# EAGLE board SensorTemperatura (EAGLE 7.4.0)
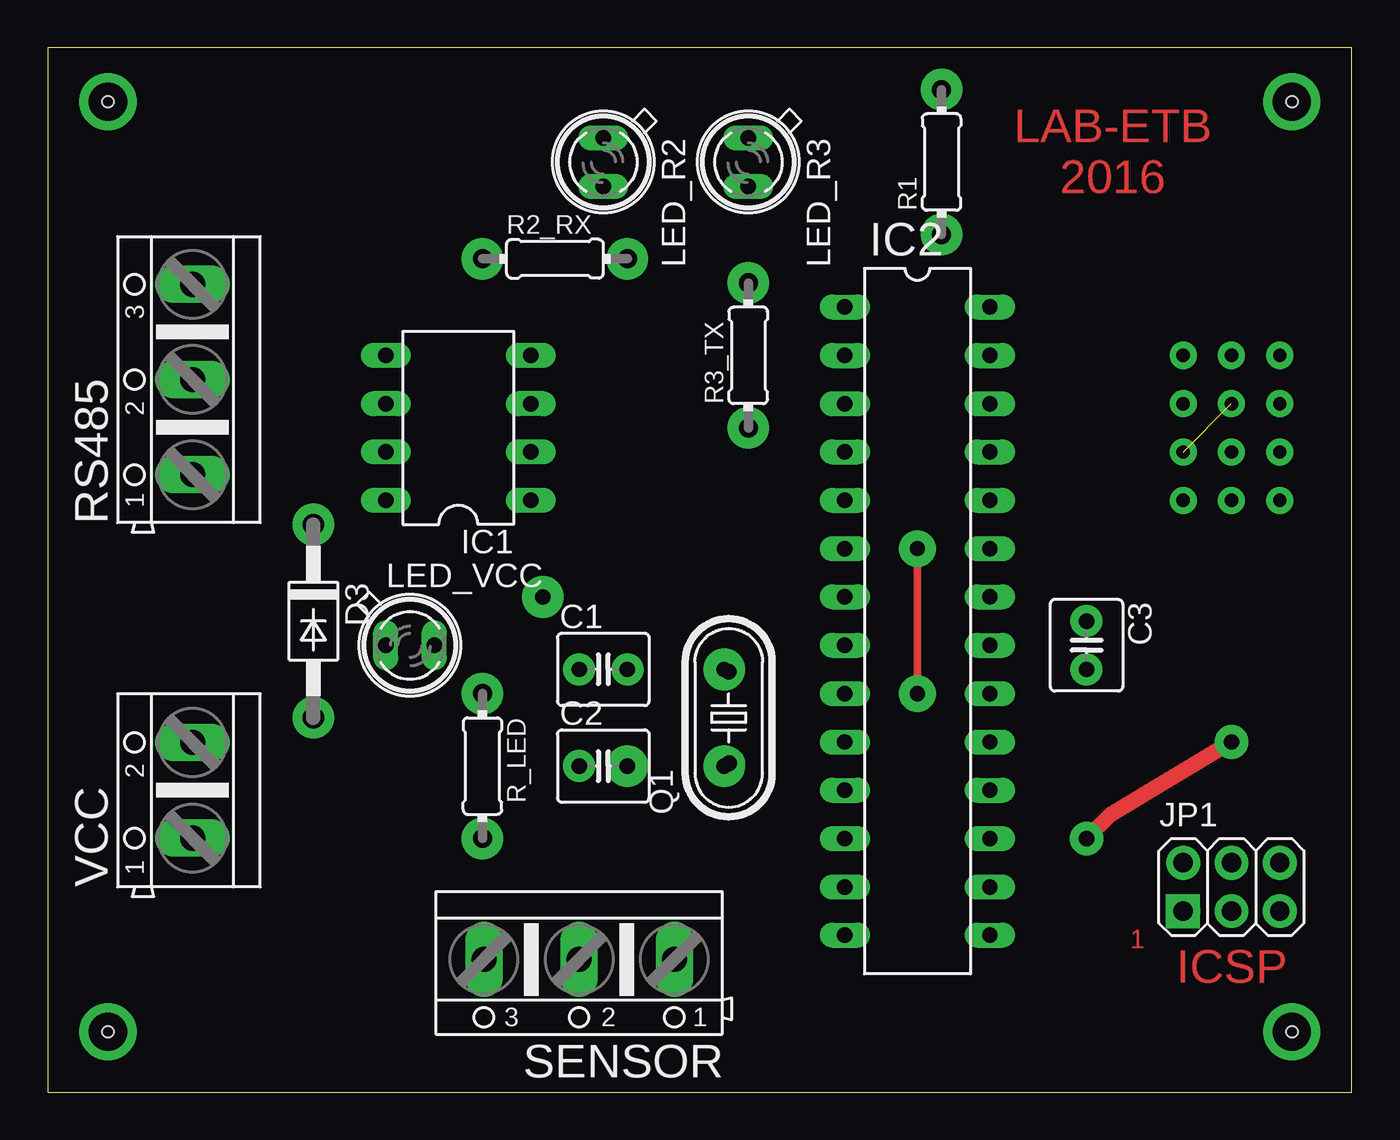
[diagram p0: board, top side]
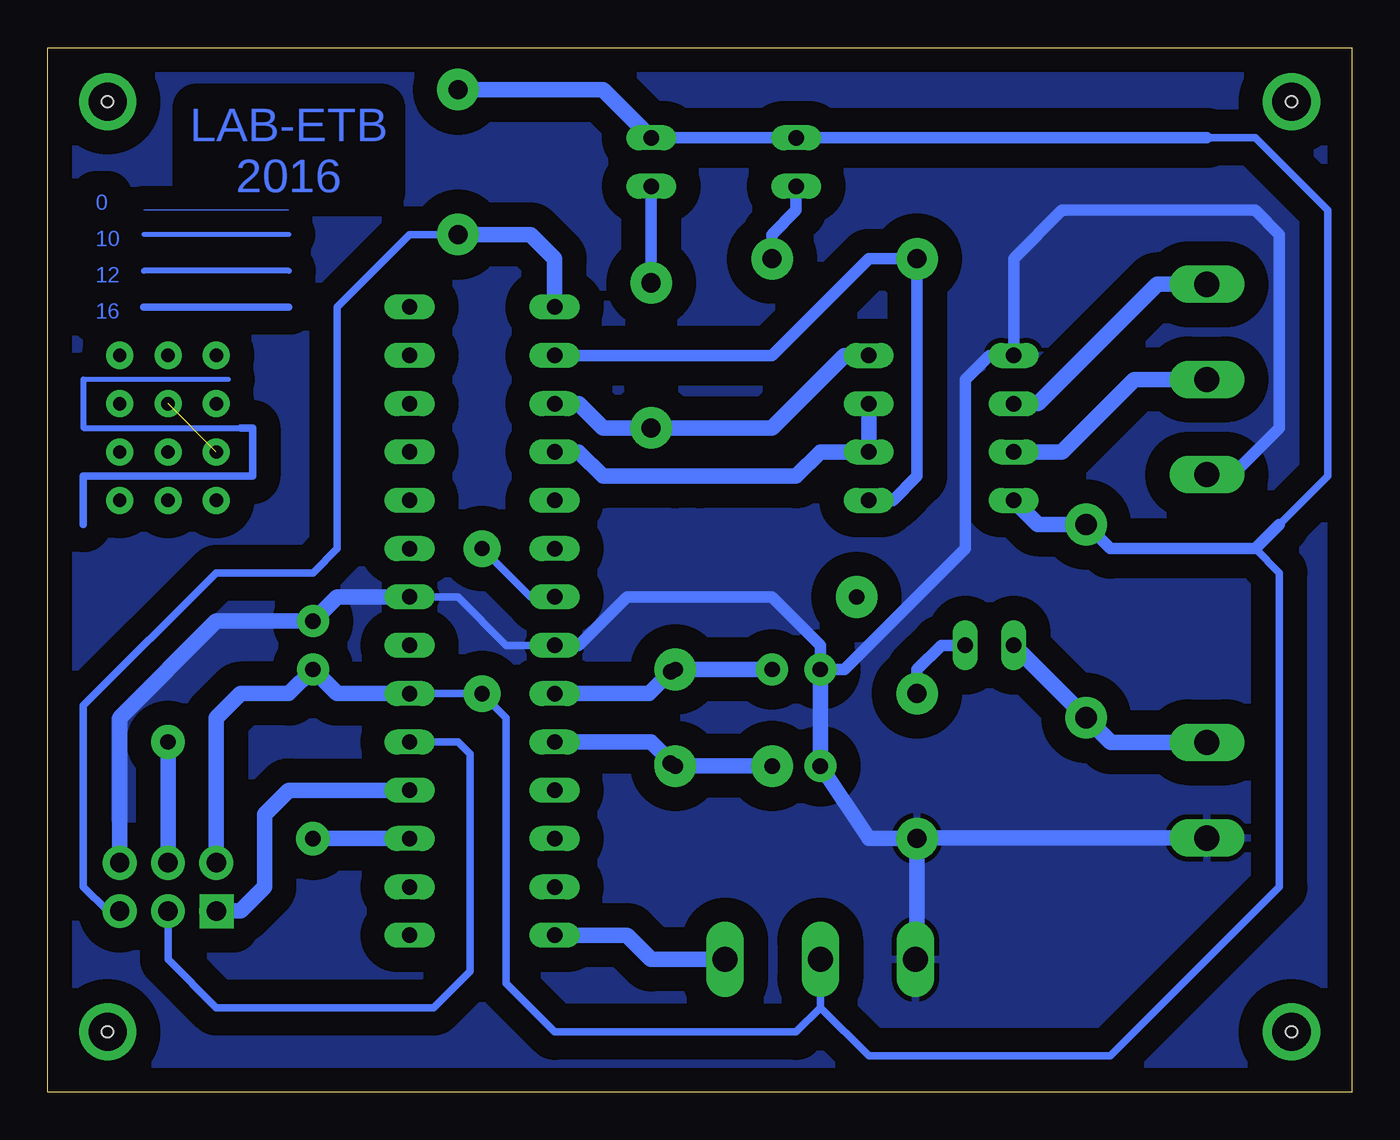
[diagram p1: board, bottom side, seen from below]

Size 68.56 x 54.92 mm. Coordinates in mm from the lower left corner, seen from the top.
Outline: 0,0 68.56,0 68.56,54.92 0,54.92 0,0
Copper layers (1*16): Top 0.035mm / dielectric 1.5mm / Bottom 0.035mm
Design rules "default": minimum track width 10mil, minimum drill 24mil, track to track 12mil, track to pad 12mil, pad to pad 12mil, via to via 12mil, smd to smd 12mil, copper to edge 40mil, drill to drill 8mil, minimum pad ring 10mil, minimum via ring 8mil, stop-mask expansion 4mil, vias tented up to drill 0mil, thermal gap 10mil
Holes 0.6 mm at 3.17,52.07 65.41,52.07 65.41,3.18 3.17,3.18

## Footprints (pad centres in the part's own frame; a part is rotated, then mirrored left to right if it is on the bottom)
C025-040X050 = drill 0.813 octagon: 1 -1.27,0; 2 1.27,0
DO41-10 = drill 1.118: A 5.08,0; C -5.08,0
DIL08 = drill 0.813 long: 1 -3.81,-3.81; 2 -1.27,-3.81; 3 1.27,-3.81; 4 3.81,-3.81; 5 3.81,3.81; 6 1.27,3.81; 7 -1.27,3.81; 8 -3.81,3.81
DIL28-3 = drill 0.813 long: 1 -16.51,-3.81; 2 -13.97,-3.81; 3 -11.43,-3.81; 4 -8.89,-3.81; 5 -6.35,-3.81; 6 -3.81,-3.81; 7 -1.27,-3.81; 8 1.27,-3.81; 9 3.81,-3.81; 10 6.35,-3.81; 11 8.89,-3.81; 12 11.43,-3.81; 13 13.97,-3.81; 14 16.51,-3.81; 15 16.51,3.81; 16 13.97,3.81; 17 11.43,3.81; 18 8.89,3.81; 19 6.35,3.81; 20 3.81,3.81; 21 1.27,3.81; 22 -1.27,3.81; 23 -3.81,3.81; 24 -6.35,3.81; 25 -8.89,3.81; 26 -11.43,3.81; 27 -13.97,3.81; 28 -16.51,3.81
2X03 = drill 1.016 octagon: 1 -2.54,-1.27; 2 -2.54,1.27; 3 0,-1.27; 4 0,1.27; 5 2.54,-1.27; 6 2.54,1.27
SFH482 = drill 0.813 long: A -1.27,0; K 1.27,0
HC49U-V = drill 0.813: 1 -2.413,0; 2 2.413,0
0204/7 = drill 1 pad 2.184: 1 -3.81,0; 2 3.81,0
AK500/3 = drill 1.321 long: 1 -5.004,0; 2 0,0; 3 5.004,0
AK500/2 = drill 1.321 long: 1 -2.515,0; 2 2.515,0

## Placement (x,y rotation side)
C1  22nf  [C025-040X050]  29.21,22.23 0 top
C2  22nf  [C025-040X050]  29.21,17.15 0 top
C3  .1nf  [C025-040X050]  54.61,23.5 270 top
D3  1N4004  [DO41-10]  13.97,24.77 270 top
IC1  MAX481CPA  [DIL08]  21.59,34.93 90 top
IC2  MEGA8-P  [DIL28-3]  45.72,24.77 270 top
JP1  [2X03]  62.23,10.79 0 top
LED_R2  [SFH482]  29.21,48.9 270 top
LED_R3  [SFH482]  36.83,48.9 270 top
LED_VCC  SFH482  [SFH482]  19.05,23.5 0 top
Q1  16mhz  [HC49U-V]  35.8,19.69 90 top
R1  [0204/7]  46.99,48.9 90 top
R2_RX  [0204/7]  26.67,43.82 0 top
R3_TX  [0204/7]  36.83,38.73 90 top
R_LED  [0204/7]  22.86,17.15 270 top
RS485  [AK500/3]  7.62,37.47 90 top
SENSOR  [AK500/3]  27.94,6.99 180 top
VCC  [AK500/2]  7.62,15.88 90 top

## Library data of the parts
C1-C3 R1 R2_RX R3_TX R_LED = rcl
D3 = diode
IC1 = maxim; MPN: MAX481CPA+; OC_FARNELL: unknown; OC_NEWARK: 99K3445
IC2 = atmel; OC_FARNELL: unknown; OC_NEWARK: unknown
JP1 = pinhead
LED_R2 LED_R3 LED_VCC = led
Q1 = crystal; OC_FARNELL: 1666969; OC_NEWARK: unknown
RS485 SENSOR VCC = con-ptr500; OC_FARNELL: unknown; OC_NEWARK: unknown

## Nets
GND: C1.1 C2.1 C3.1 IC1.5 IC2.8 IC2.22 JP1.6 R_LED.2 SENSOR.3 VCC.1
N$1: IC1.2 IC1.3 IC2.4
N$2: IC2.18 JP1.1
N$3: IC1.1 IC2.2 R2_RX.1
N$4: LED_R2.K R2_RX.2
N$5: LED_R3.K R3_TX.2
N$6: IC1.4 IC2.3 R3_TX.1
N$7: IC1.6 RS485.3
N$8: IC1.7 RS485.2
N$9: IC2.19 JP1.3
N$10: IC2.14 SENSOR.1
N$11: C1.2 IC2.9 Q1.2
N$12: C2.2 IC2.10 Q1.1
N$13: IC2.1 JP1.5 R1.1
N$14: IC2.17 JP1.4
N$15: D3.A LED_VCC.A VCC.2
N$17: LED_VCC.K R_LED.1
VCC: C3.2 D3.C IC1.8 IC2.7 IC2.20 JP1.2 LED_R2.A LED_R3.A R1.2 SENSOR.2

## Tracks (layer width: path | path; a pad name or v marks a point on that pad's centre or on a via)
GND
  Bottom 0.406: IC2.8 44.45,23.5 46.99,26.04 IC2.22
  Bottom 0.61: IC2.8 40.64,23.5 38.1,26.04 30.48,26.04 27.94,23.5 C1.1 26.67,22.23 20.32,28.58 20.32,37.47 19.05,38.73 IC1.5 17.78,43.82 15.24,46.36 5.08,46.36 3.81,45.09 3.81,34.93 6.35,32.39 7.62,32.39
  Bottom 0.813: VCC.1 22.83,13.36 R_LED.2 | R_LED.2 25.4,13.33 C2.1 C1.1 | R_LED.2 22.86,7.06 SENSOR.3 | IC2.22 53.34,26.04 C3.1 59.69,24.77 64.77,19.69 JP1.6
  pour Bottom (isolate 1.27): 0,54.61 68.58,54.61 68.58,0 0,0
N$1
  Bottom 0.813: IC1.3 IC1.2 27.94,33.66 29.21,32.39 34.29,32.39 35.56,32.39 39.37,32.39 40.64,33.66 IC2.4
N$2
  Bottom 0.813: JP1.1 58.42,9.53 57.15,10.79 57.15,14.61 55.88,15.88 IC2.18
N$3
  Bottom 0.61: IC2.2 30.48,38.73 25.4,43.82 R2_RX.1 22.86,32.39 24.13,31.12 IC1.1
N$4
  Bottom 0.61: LED_R2.K 29.21,46.36 30.48,45.09 R2_RX.2
N$5
  Bottom 0.61: LED_R3.K R3_TX.2
N$6
  Bottom 0.813: IC2.3 40.64,36.2 39.37,34.93 R3_TX.1 30.48,34.93 26.67,38.73 IC1.4
N$7
  Bottom 0.813: RS485.3 10.24,42.47 16.51,36.2 IC1.6
N$8
  Bottom 0.813: RS485.2 11.43,37.47 15.24,33.66 IC1.7
N$9
  Bottom 0.406: IC2.19 46.99,18.41 46.36,17.78 46.36,6.35 48.26,4.45 59.69,4.45 62.23,6.99 JP1.3
N$10
  Bottom 0.813: SENSOR.1 36.83,6.99 38.1,8.26 IC2.14
N$11
  Bottom 0.813: C1.2 35.68,22.23 Q1.2 36.95,20.96 IC2.9
N$12
  Bottom 0.813: C2.2 35.68,17.15 Q1.1 35.8,17.39 36.83,18.41 IC2.10
N$13
  Bottom 0.406: R1.1 49.53,45.09 53.34,41.28 53.34,28.58 54.61,27.3 59.69,27.3 66.67,20.32 66.67,10.79 65.41,9.53 JP1.5
  Bottom 0.813: IC2.1 41.91,43.82 43.18,45.09 R1.1
N$14  (via drill 0.8 pad 1.78)
  Top 0.813: v62.23,18.41 55.88,14.61 v54.61,13.33
  Bottom 0.813: JP1.4 v62.23,18.41 | v54.61,13.33 IC2.17
N$15
  Bottom 0.813: VCC.2 12.68,18.39 D3.A LED_VCC.A
N$17
  Bottom 0.61: LED_VCC.K 21.59,23.5 22.86,22.23 R_LED.1
S$1  (via drill 0.8 pad 2.18)
  other vias: 13.97,29.84
S$2  (via drill 0.8 pad 2.18)
  other vias: 13.97,19.69
S$3  (via drill 0.8 pad 1.68)
  other vias: 27.94,17.15
S$4  (via drill 0.8 pad 1.68)
  other vias: 30.48,17.15
S$5  (via drill 0.8 pad 1.68)
  other vias: 30.48,22.23
S$6  (via drill 0.8 pad 1.68)
  other vias: 27.94,22.23
S$7  (via drill 0.8 pad 1.68)
  other vias: 35.83,17.3
S$8  (via drill 0.8 pad 1.68)
  other vias: 35.78,22.11
S$9  (via drill 0.8 pad 1.68)
  other vias: 54.61,24.77
S$10  (via drill 0.8 pad 1.68)
  other vias: 54.61,22.23
S$11  (via drill 2 pad 2.54)
  other vias: 3.17,52.07
S$12  (via drill 2 pad 2.54)
  other vias: 65.41,52.07
S$13  (via drill 2 pad 2.54)
  other vias: 65.41,3.18
S$14  (via drill 2 pad 2.54)
  other vias: 3.17,3.18
S$15  (via drill 0.6 pad 1.78)
  other vias: 59.69,9.53
S$16  (via drill 0.6 pad 1.78)
  other vias: 64.77,12.06
S$17  (via drill 0.6 pad 1.78)
  other vias: 64.77,9.53
S$18  (via drill 0.6 pad 1.78)
  other vias: 62.23,12.06
S$19  (via drill 0.6 pad 1.78)
  other vias: 62.23,9.53
S$20  (via drill 0.6 pad 1.78)
  other vias: 59.69,12.06
S$21  (via drill 0.8 pad 2.18)
  other vias: 35.56,17.15
S$22  (via drill 0.8 pad 2.18)
  other vias: 35.56,22.23
S$23  (via drill 0.8 pad 2.18)
  other vias: 30.48,17.15
S$24  (via drill 0.8 pad 2.18)
  other vias: 26.04,26.04
S$25  (via drill 0.7 pad 1.42)
  other vias: 59.69,38.73
S$26  (via drill 0.7 pad 1.42)
  other vias: 59.69,36.2
S$27  (via drill 0.7 pad 1.42)
  other vias: 62.23,38.73
S$28  (via drill 0.7 pad 1.42)
  other vias: 64.77,38.73
S$29  (via drill 0.7 pad 1.42)
  other vias: 64.77,36.2
S$30  (via drill 0.7 pad 1.42)  (1 unrouted)
  other vias: 62.23,36.2 59.69,33.66
S$31  (via drill 0.7 pad 1.42)
  other vias: 62.23,33.66
S$32  (via drill 0.7 pad 1.42)
  other vias: 64.77,33.66
S$33  (via drill 0.7 pad 1.42)
  other vias: 59.69,31.12
S$34  (via drill 0.7 pad 1.42)
  other vias: 62.23,31.12
S$35  (via drill 0.7 pad 1.42)
  other vias: 64.77,31.12
S$36
  Bottom 0.254: 59.05,37.47 66.67,37.47
  Bottom 0.305: 66.67,37.47 66.67,34.93 58.42,34.93
  Bottom 0.406: 58.42,34.93 57.79,34.93 57.79,32.39 66.67,32.39 66.67,29.84
S$37
  Bottom 0: 55.88,46.36 63.5,46.36
S$38
  Bottom 0.254: 55.88,45.09 63.5,45.09
S$39
  Bottom 0.305: 55.88,43.18 63.5,43.18
S$40
  Bottom 0.406: 55.88,41.28 63.5,41.28
S$41  (via drill 0.6 pad 1.78)
  other vias: 59.68,9.51
VCC  (via drill 0.8 pad 1.93)
  Top 0.406: v45.72,28.58 v45.72,20.96
  Bottom 0.406: SENSOR.2 27.94,4.45 | 27.94,4.45 25.4,1.91 12.7,1.91 3.81,10.79 3.81,27.3 5.08,28.58 | 27.94,4.45 29.21,3.18 41.91,3.18 44.45,5.72 44.45,19.69 v45.72,20.96 IC2.20 | IC2.7 43.18,26.04 v45.72,28.58 | 3.81,29.84 1.27,32.39 1.27,46.36 5.08,50.16 7.62,50.16
  Bottom 0.61: LED_R3.A LED_R2.A 7.62,50.16 | 3.81,29.84 5.08,28.58 12.7,28.58 D3.C
  Bottom 0.813: IC1.8 16.51,29.84 D3.C | IC2.20 53.34,20.96 C3.2 55.88,20.96 58.42,20.96 59.69,19.69 JP1.2 | R1.2 39.37,52.7 LED_R3.A

## Text on the board
Top: LAB-ETB / 2016 | 1 | ICSP
Bottom: LAB-ETB / 2016 | 0 | 10 | 12 | 16